# EAGLE board HydraRelayBoard (EAGLE 5.06)
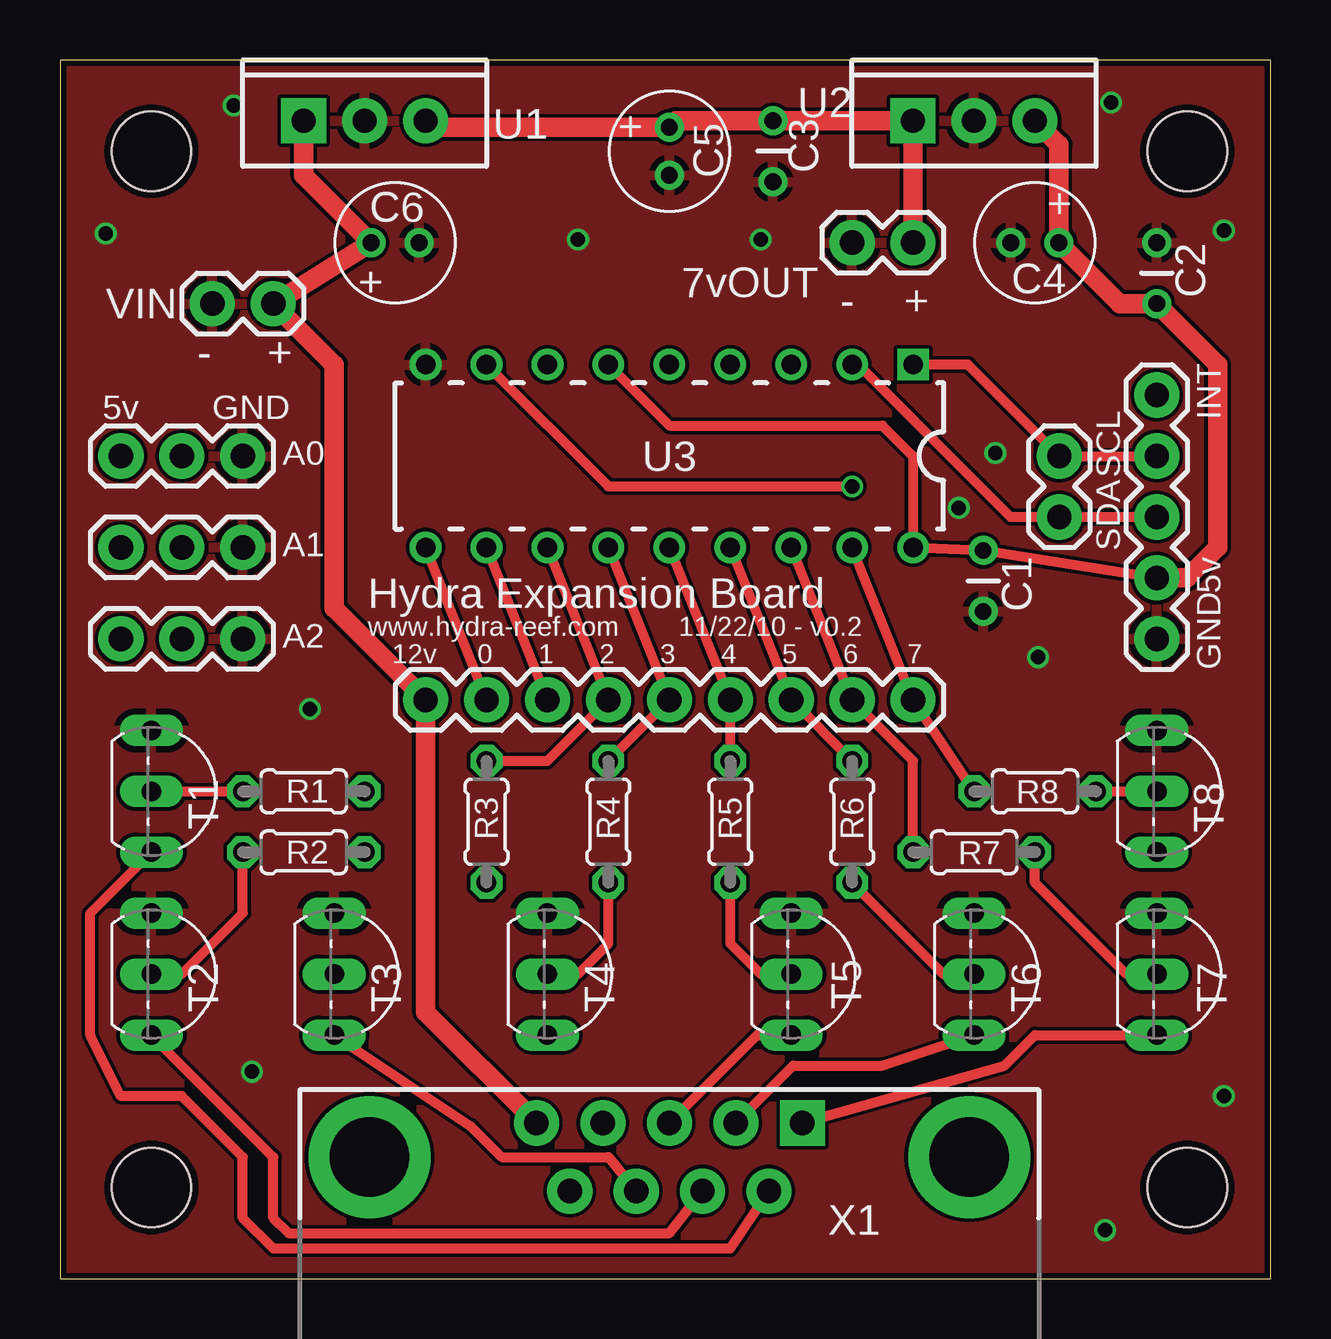
[diagram p0: board, top side]
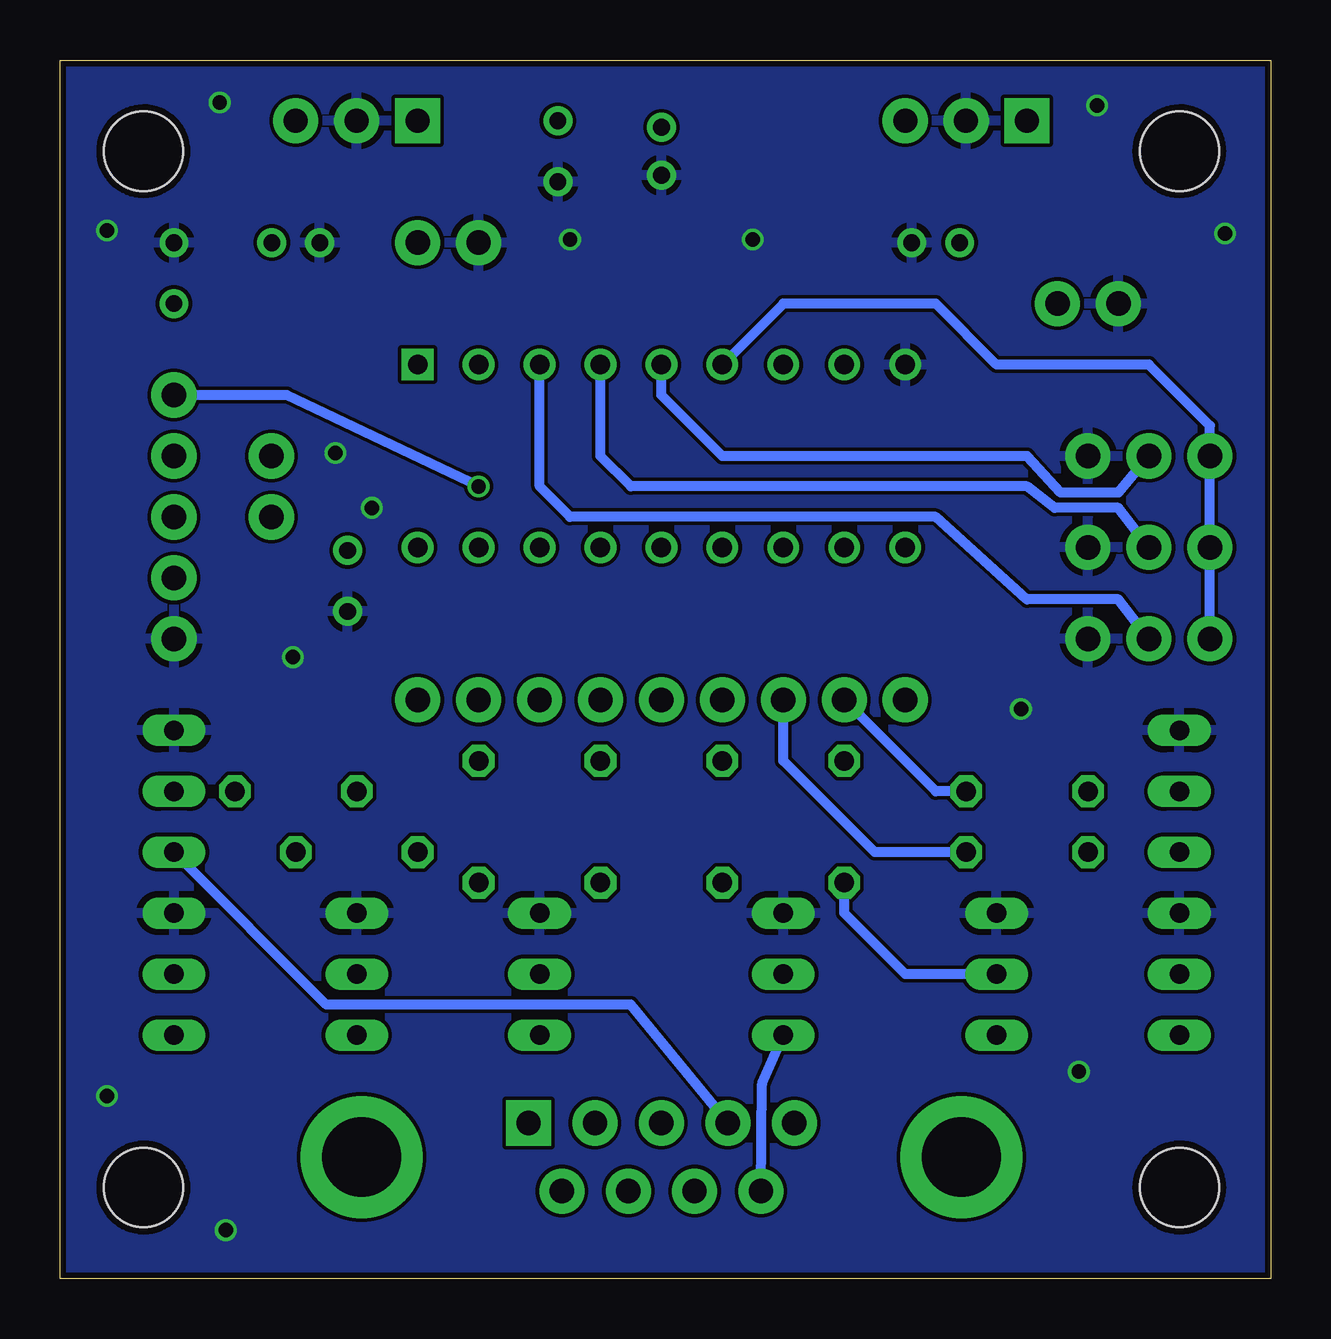
[diagram p1: board, bottom side, seen from below]

Size 50.47 x 50.79 mm. Coordinates in mm from the lower left corner, seen from the top.
Outline: 0,0 50.47,0 50.47,50.79 0,50.79 0,0
Copper layers (1*16): Top 0.035mm / dielectric 1.5mm / Bottom 0.035mm
Design rules "Fusion_eagle_rule_v1.1": minimum track width 6mil, minimum drill 12mil, track to track 6mil, track to pad 6mil, pad to pad 6mil, via to via 6mil, smd to smd 0mil, copper to edge 10mil, drill to drill 10mil, minimum pad ring 10mil, minimum via ring 6mil, stop-mask expansion 2mil, vias tented up to drill 100mil, thermal gap 10mil

## Footprints (pad centres in the part's own frame; a part is rotated, then mirrored left to right if it is on the bottom)
CAP-PTH-SMALL = drill 0.7 round: 1 0,0; 2 2.54,0
CAP5MM2MM = drill 0.7 round: + 1,0; - -1,0
1X03 = drill 1.016 pad 1.88 round: 1 0,0; 2 2.54,0; 3 5.08,0
1X02 = drill 1.016 pad 1.88 round: 1 0,0; 2 2.54,0
1X05 = drill 1.016 pad 1.88 round: 1 0,0; 2 2.54,0; 3 5.08,0; 4 7.62,0; 5 10.16,0
1X09 = drill 1.016 pad 1.88 round: 1 0,0; 2 2.54,0; 3 5.08,0; 4 7.62,0; 5 10.16,0; 6 12.7,0; 7 15.24,0; 8 17.78,0; 9 20.32,0
STAND-OFF = hole 3.302: 0,0
0204/5 = drill 0.813 octagon: 1 -2.54,0; 2 2.54,0
TO92-EBC-OVAL = drill 0.813 long: B 0,-1.27; C 2.54,-1.27; E -2.54,-1.27
TO220-VERT = drill 1 pad 1.88 round: GND 0,0; OUT 2.54,0 | drill 1 pad 1.88 square: IN -2.54,0
DIL18 = drill 0.813 square: 1 -10.16,-3.81 | drill 0.813 round: 2 -7.62,-3.81; 3 -5.08,-3.81; 4 -2.54,-3.81; 5 0,-3.81; 6 2.54,-3.81; 7 5.08,-3.81; 8 7.62,-3.81; 9 10.16,-3.81; 10 10.16,3.81; 11 7.62,3.81; 12 5.08,3.81; 13 2.54,3.81; 14 0,3.81; 15 -2.54,3.81; 16 -5.08,3.81; 17 -7.62,3.81; 18 -10.16,3.81
DB9 = drill 1.016 pad 1.88 square: 1 -5.54,-1.42 | drill 1.016 pad 1.88 round: 2 -2.77,-1.42; 3 0,-1.42; 4 2.77,-1.42; 5 5.54,-1.42; 6 -4.15,1.42; 7 -1.38,1.42; 8 1.38,1.42; 9 4.15,1.42 | drill 3.302 pad 5.08 round: G1 -12.5,0; G2 12.5,0

## Placement (x,y rotation side)
C1  .1uF  [CAP-PTH-SMALL]  38.48,27.81 90 top
C2  .1uF  [CAP-PTH-SMALL]  45.72,40.64 90 top
C3  .1uF  [CAP-PTH-SMALL]  29.72,48.26 270 top
C4  47uF  [CAP5MM2MM]  40.64,43.18 0 top
C5  47uF  [CAP5MM2MM]  25.4,46.99 90 top
C6  47uF  [CAP5MM2MM]  13.97,43.18 180 top
J1  [1X03]  2.54,34.29 0 top
J2  [1X03]  2.54,30.48 0 top
J3  [1X03]  2.54,26.67 0 top
JP1  [1X02]  6.35,40.64 0 top
JP3  [1X02]  33.02,43.18 0 top
JP4  [1X05]  45.72,26.67 90 top
JP5  [1X02]  41.66,31.75 90 top
JP6  M09  [1X09]  15.24,24.13 0 top
JP9  STAND-OFF  [STAND-OFF]  46.99,3.81 0 top
JP10  STAND-OFF  [STAND-OFF]  3.81,3.81 0 top
JP11  STAND-OFF  [STAND-OFF]  46.99,46.99 0 top
JP12  STAND-OFF  [STAND-OFF]  3.81,46.99 0 top
R1  [0204/5]  10.16,20.32 0 top
R2  [0204/5]  10.16,17.78 0 top
R3  [0204/5]  17.78,19.05 90 top
R4  [0204/5]  22.86,19.05 90 top
R5  [0204/5]  27.94,19.05 90 top
R6  [0204/5]  33.02,19.05 90 top
R7  [0204/5]  38.1,17.78 180 top
R8  [0204/5]  40.64,20.32 180 top
T1  [TO92-EBC-OVAL]  5.08,20.32 270 top
T2  [TO92-EBC-OVAL]  5.08,12.7 270 top
T3  [TO92-EBC-OVAL]  12.7,12.7 270 top
T4  [TO92-EBC-OVAL]  21.59,12.7 270 top
T5  [TO92-EBC-OVAL]  31.75,12.7 270 top
T6  [TO92-EBC-OVAL]  39.37,12.7 270 top
T7  [TO92-EBC-OVAL]  46.99,12.7 270 top
T8  [TO92-EBC-OVAL]  46.99,20.32 270 top
U1  [TO220-VERT]  12.7,48.26 0 top
U2  [TO220-VERT]  38.1,48.26 0 top
U3  MCP23008DIP18  [DIL18]  25.4,34.29 180 top
X1  [DB9]  25.4,5.08 180 top

## Library data of the parts
C1-C6 J1-J3 JP1 JP3-JP5 R1-R8 U1-U3 = _allyourbase
JP6 JP9-JP12 X1 = SparkFun
T1-T8 = adafruit

## Nets
+5V: C1.2 C2.1 C4.+ J1.1 J2.1 J3.1 JP4.2 U2.OUT U3.6 U3.18
+7V: C3.1 C5.+ JP3.2 U1.OUT U2.IN
+12V: C6.+ JP1.2 JP6.1 U1.IN X1.5
GND: C1.1 C2.2 C3.2 C4.- C5.- C6.- J1.3 J2.3 J3.3 JP1.1 JP3.1 JP4.1 T1.E T2.E T3.E T4.E T5.E T6.E T7.E T8.E U1.GND U2.GND U3.9
N$3: JP4.5 U3.8
N$6: J3.2 U3.3
N$7: J2.2 U3.4
N$8: J1.2 U3.5
N$9: JP4.4 JP5.2 U3.1
N$10: T1.C X1.6
N$11: T2.C X1.7
N$12: JP6.7 R6.2 U3.15
N$13: JP6.6 R5.2 U3.14
N$14: JP6.5 R4.2 U3.13
N$15: JP6.4 R3.2 U3.12
N$16: JP6.3 R2.2 U3.11
N$17: JP6.2 R1.2 U3.10
N$18: JP4.3 JP5.1 U3.2
N$19: JP6.9 R8.2 U3.17
N$20: JP6.8 R7.2 U3.16
N$21: T3.C X1.8
N$22: T4.C X1.9
N$23: R1.1 T1.B
N$24: R2.1 T2.B
N$25: R3.1 T3.B
N$26: R4.1 T4.B
N$28: R5.1 T5.B
N$29: R6.1 T6.B
N$30: R7.1 T7.B
N$31: R8.1 T8.B
N$32: T5.C X1.3
N$33: T6.C X1.2
N$34: T7.C X1.1
N$35: T8.C X1.4

## Tracks (layer width: path | path; a pad name or v marks a point on that pad's centre or on a via)
+5V
  Top 0.406: JP4.2 C1.2 U3.18 35.56,34.29 34.29,35.56 25.4,35.56 U3.6
  Top 0.813: U2.OUT 41.64,47.26 C4.+ 44.18,40.64 C2.1 48.26,38.1 48.26,30.48 46.99,29.21 JP4.2
  Bottom 0.406: U3.6 20.32,40.64 13.97,40.64 11.43,38.1 5.08,38.1 2.54,35.56 J1.1 J2.1 J3.1
+7V
  Top 0.406: 15.51,47.99 U1.OUT | C5.+ 25.67,48.26
  Top 0.813: 15.51,47.99 C5.+ | 25.67,48.26 C3.1 U2.IN JP3.2
+12V
  Top 0.813: U1.IN 10.16,45.99 C6.+ JP1.2 11.43,38.1 11.43,27.94 JP6.1 15.24,11.12 X1.5
GND  (via drill 0.6)
  other vias: 1.91,43.56 7.24,48.9 21.59,43.31 29.21,43.31 43.81,49.02 48.51,43.69 40.77,25.91 10.41,23.75 8,8.64 43.56,2.03 48.51,7.62 38.99,34.42 37.47,32.13
  pour Bottom: 0,50.8 50.8,50.8 50.8,0 0,0
  pour Top: 0,50.8 50.8,50.8 50.8,0 0,0
N$3  (via drill 0.6)
  Top 0.406: U3.8 22.86,33.02 v33.02,33.02
  Bottom 0.406: v33.02,33.02 41.02,36.83 JP4.5
N$6
  Bottom 0.406: U3.3 30.48,33.02 29.21,31.75 13.97,31.75 10.16,28.32 6.35,28.32 J3.2
N$7
  Bottom 0.406: U3.4 27.94,34.29 26.67,33.02 10.16,33.02 9.02,32.13 6.35,32.13 J2.2
N$8
  Bottom 0.406: U3.5 25.4,36.83 22.86,34.29 10.16,34.29 8.76,32.77 6.35,32.77 J1.2
N$9
  Top 0.406: U3.1 37.85,38.1 JP5.2 JP4.4
N$10
  Top 0.406: T1.C 1.27,15.24 1.27,10.16 2.54,7.62 5.08,7.62 7.62,5.08 7.62,2.54 8.89,1.27 27.94,1.27 X1.6
N$11
  Top 0.406: T2.C 8.89,5.08 8.89,2.54 9.53,1.91 25.4,1.91 X1.7
N$12
  Top 0.406: U3.15 JP6.7 R6.2
N$13
  Top 0.406: U3.14 JP6.6 R5.2
N$14
  Top 0.406: U3.13 JP6.5 R4.2
N$15
  Top 0.406: U3.12 JP6.4 20.32,21.59 R3.2
N$16
  Top 0.406: JP6.3 U3.11
  Bottom 0.406: R2.2 16.51,17.78 20.32,21.59 JP6.3
N$17
  Top 0.406: JP6.2 U3.10
  Bottom 0.406: R1.2 13.97,20.32 JP6.2
N$18
  Top 0.406: U3.2 33.27,38.1 39.62,31.75 JP5.1 JP4.3
N$19
  Top 0.406: U3.17 JP6.9 R8.2
N$20
  Top 0.406: U3.16 JP6.8 35.56,21.59 R7.2
N$21
  Top 0.406: T3.C 17.14,6.35 18.41,5.08 22.86,5.08 X1.8
N$22
  Bottom 0.406: T4.C 21.21,8.13 X1.9
N$23
  Top 0.406: T1.B R1.1
N$24
  Top 0.406: R2.1 7.62,15.24 5.08,12.7 T2.B
N$25
  Bottom 0.406: R3.1 17.78,15.24 15.24,12.7 T3.B
N$26
  Top 0.406: R4.1 22.86,13.97 21.59,12.7 T4.B
N$28
  Top 0.406: R5.1 27.94,13.97 29.21,12.7 T5.B
N$29
  Top 0.406: R6.1 36.83,12.7 T6.B
N$30
  Top 0.406: R7.1 40.64,16.51 44.45,12.7 T7.B
N$31
  Top 0.406: R8.1 T8.B
N$32
  Top 0.406: T5.C 29.06,10.16 X1.3
N$33
  Top 0.406: T6.C 34.29,8.89 30.56,8.89 X1.2
N$34
  Top 0.406: T7.C 40.64,10.16 39.37,8.89 X1.1
N$35
  Bottom 0.406: T8.C 39.37,11.43 26.67,11.43 X1.4

## Text on the board
tNames: U2 | U1 | 7vOUT | VIN | - | + | - | + | 5v | GND | INT | A0 | SCL | A1 | SDA | 5v | Hydra Expansion Board | www.hydra-reef.com | 11/22/10 - v0.2 | A2 | 12v | 0 | 1 | 2 | 3 | 4 | 5 | 6 | 7 | GND